# Altium PCB DX-PJ08-V1.1_PCB_Footprint_AD.PcbDoc
Units mm, origin at the board's own origin, x right, y up, seen from the top; angles counter-clockwise.
Board outline 152.4 x 101.6 mm, 2 copper layers (Top, Bottom), stack 0.323 mm thick; 1 components, 0 nets, 10 pads, 0 vias.
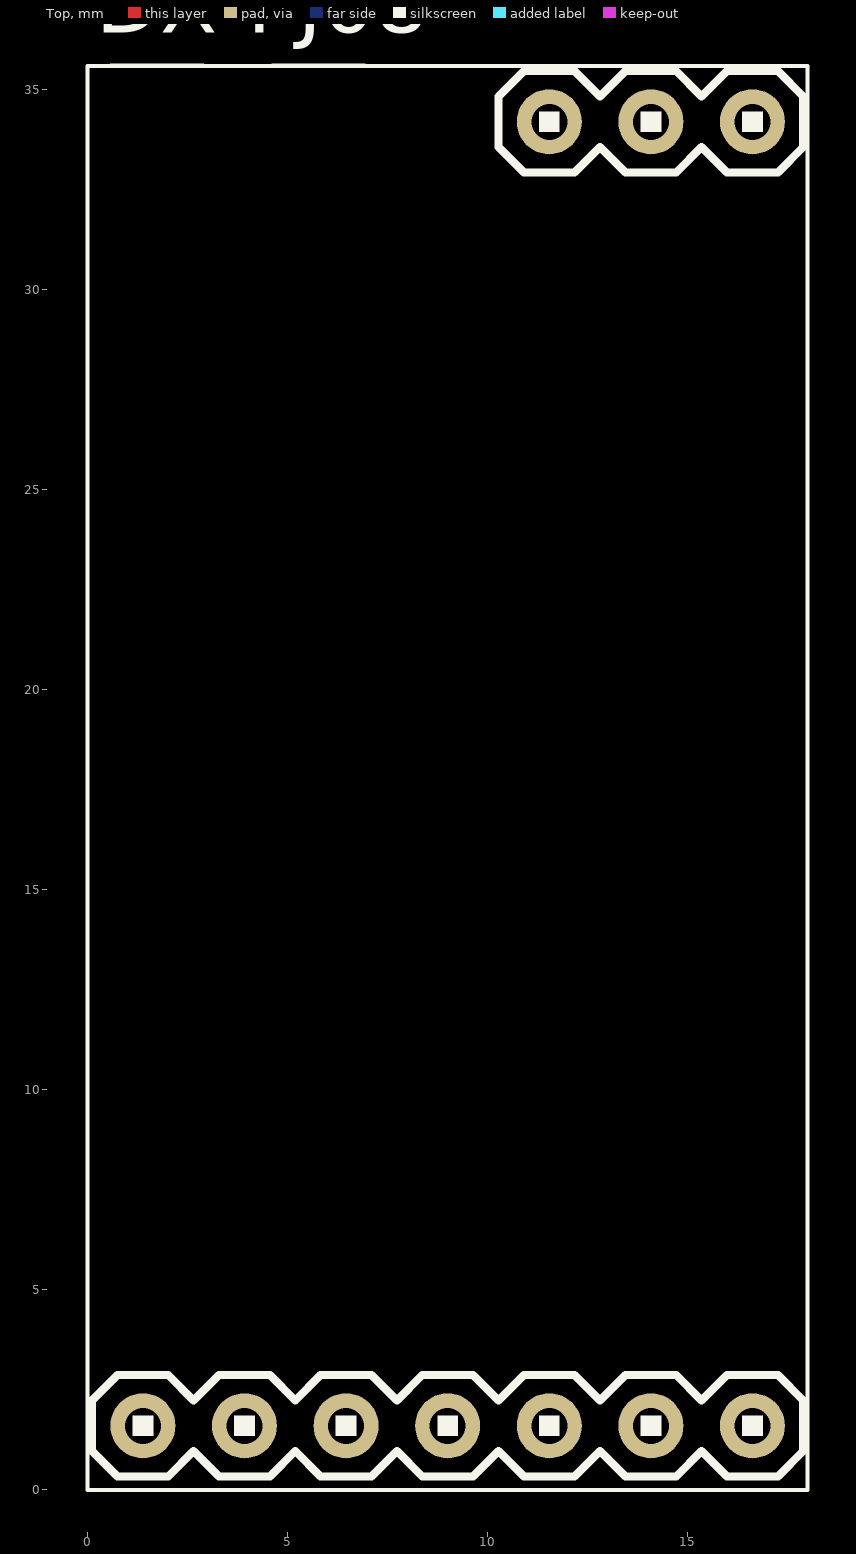
[diagram p0: Top view]
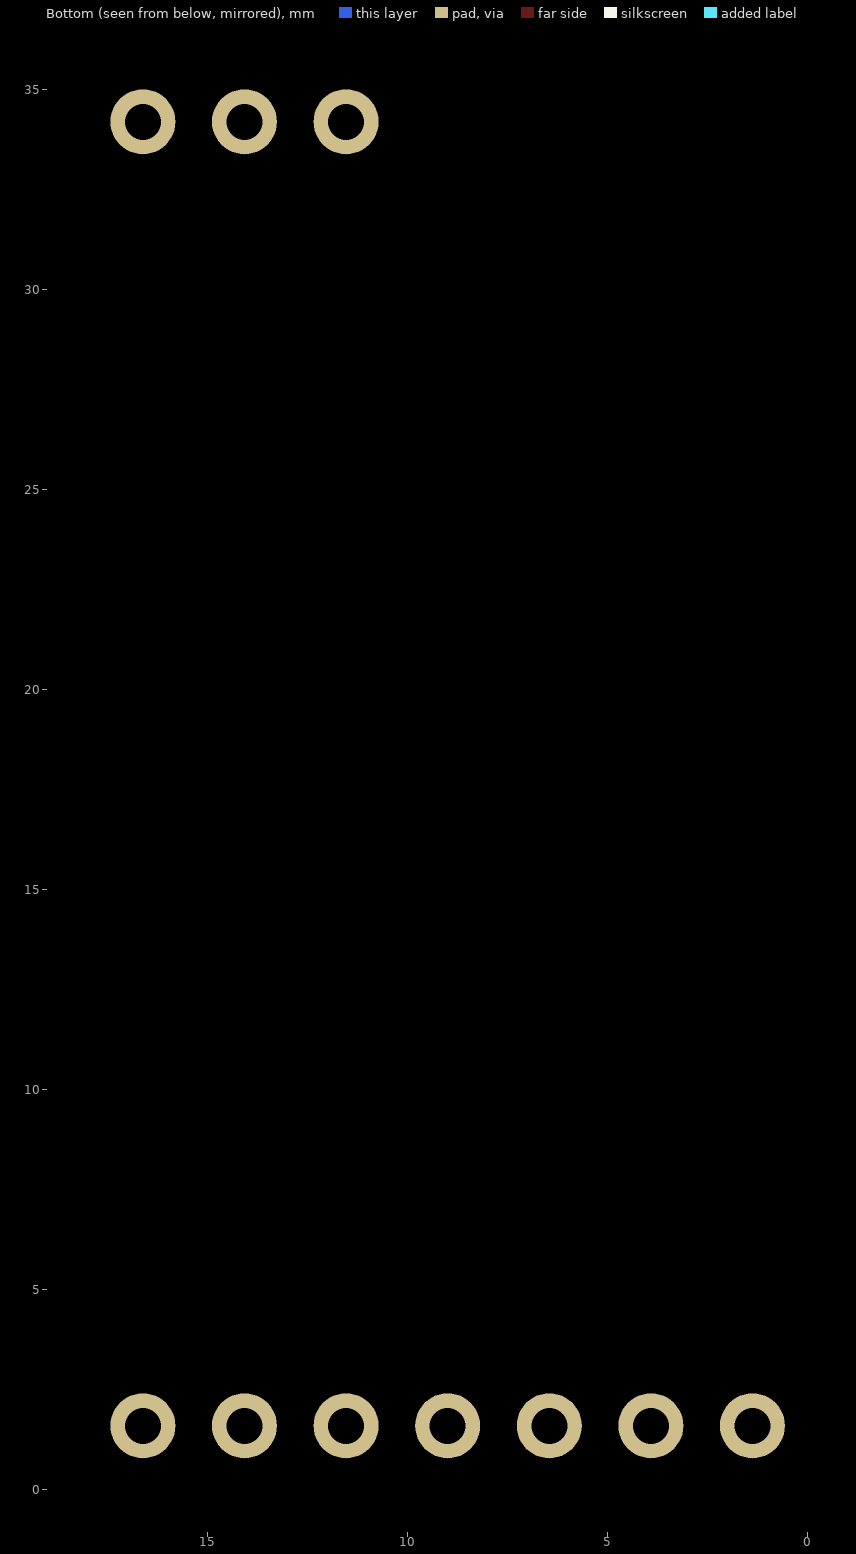
[diagram p1: Bottom view, seen from below]

## Layer stack, top to bottom
Solder Mask Top: solder mask 0.0102, Solder Resist, Dk 3.5
Top: signal copper 0.0343
Dielectric 1: dielectric 0.254, FR-4, Dk 4.3
Bottom: signal copper 0.0343
Solder Mask Bottom: solder mask 0.0102, Solder Resist, Dk 3.5

## Board outline
-694.363,-676.631 -541.963,-676.631 -541.963,-575.031 -694.363,-575.031

## Design rules (kind name [scope] priority, off if disabled: settings)
Clearance "'Default' PADS rule_17" [All] p1: gap=0.152 ignorepadtopadclearanceinfootprint=FALSE except(0: Arc-Hole Track-Hole SMDPad-Hole THPad-Hole Via-Hole Fill-Hole Poly-Hole Region-Hole Text-Hole)
Clearance "'Default' PADS rule_16" [InPolygon vs InPolygon] p2: gap=0.2 ignorepadtopadclearanceinfootprint=FALSE except(0: Arc-Hole Track-Hole SMDPad-Hole THPad-Hole Via-Hole Fill-Hole Poly-Hole Region-Hole Text-Hole)
Clearance "'Default' PADS rule_15" [All] p3: gap=0.152 ignorepadtopadclearanceinfootprint=FALSE except(0: Arc-Hole Track-Hole SMDPad-Hole THPad-Hole Via-Hole Fill-Hole Poly-Hole Region-Hole Text-Hole)
ComponentClearance "'Default' PADS rule_12" [All] p1: gap=0 collisioncheckmode=3 verticalgap=0.254 showdistances=FALSE
FlightTimeFalling "'Default' PADS rule_10" [All] p1: maximum=10.00
FlightTimeRising "'Default' PADS rule_9" [All] p1: maximum=10.00
Length "'Default' PADS rule_5" [All] p1: maxlimit=1270 minlimit=0
MatchedLengths "'Default' PADS rule_11" [InNetClass('All Nets')] p1: tolerance=5.08 checknetsindiffpair=TRUE checkdiffpairvsdiffpair=FALSE checkxsignals=FALSE checkothers=FALSE
MaxMinImpedance "'Default' PADS rule_8" [All] p1: minimum=50.00 maximum=150.0
ParallelSegment "'Default' PADS rule_7" [All] p1: limit=25.4 gap=5.08
ParallelSegment "'Default' PADS rule_6" [All] p2: limit=25.4 gap=5.08
PlaneClearance "'Default' PADS rule_14" [All] p1: clearance=0.2
PlaneConnect "Power Plane Connect Style - Via from round thru-hole global defaults" [IsVia] p1: planeconnectstyle=Direct reliefexpansion=0.508 reliefentries=4 reliefconductorwidth=0.381 reliefairgap=0.254
PlaneConnect "Power Plane Connect Style - Round thru-hole pad from global defaults" [IsPad And OnMultiLayer And (PadShape_MidLayer1 = 'Round') And (PadXSize_MidLayer1 = PadYSize_MidLayer1)] p2: planeconnectstyle=Direct reliefexpansion=0.508 reliefentries=4 reliefconductorwidth=0.381 reliefairgap=0.254
PlaneConnect "Power Plane Connect Style - Square thru-hole pad from global defaults" [IsPad And OnMultiLayer And ((PadShape_MidLayer1 = 'Rectangular') Or (PadShape_MidLayer1 = 'Octagonal') Or (PadShape_MidLayer1 = 'Rounded Rectangle')) And (PadXSize_MidLayer1 = PadYSize_MidLayer1)] p3: planeconnectstyle=Direct reliefexpansion=0.508 reliefentries=4 reliefconductorwidth=0.381 reliefairgap=0.254
PlaneConnect "Power Plane Connect Style - Rect thru-hole pad from global defaults" [IsPad And OnMultiLayer And ((PadShape_MidLayer1 = 'Rectangular') Or (PadShape_MidLayer1 = 'Octagonal') Or (PadShape_MidLayer1 = 'Rounded Rectangle')) And (PadXSize_MidLayer1 <> PadYSize_MidLayer1)] p4: planeconnectstyle=Direct reliefexpansion=0.508 reliefentries=4 reliefconductorwidth=0.381 reliefairgap=0.254
PlaneConnect "Power Plane Connect Style - Square-rect thru-hole pad from global defaults" [IsPad And OnMultiLayer And (PadShape_MidLayer1 = 'Rounded Rectangle') And (PadXSize_MidLayer1 = PadYSize_MidLayer1) And (Pad_CornerRadius_MidLayer1 = '0%')] p5: planeconnectstyle=Direct reliefexpansion=0.508 reliefentries=4 reliefconductorwidth=0.381 reliefairgap=0.254
PlaneConnect "Power Plane Connect Style - Oval thru-hole pad from global defaults" [IsPad And OnMultiLayer And (PadShape_MidLayer1 = 'Round') And (PadXSize_MidLayer1 <> PadYSize_MidLayer1)] p6: planeconnectstyle=Direct reliefexpansion=0.508 reliefentries=4 reliefconductorwidth=0.381 reliefairgap=0.254
PlaneConnect "Power Plane Connect Style - Round-oval thru-hole pad from global defaults" [IsPad And OnMultiLayer And (PadShape_MidLayer1 = 'Rounded Rectangle') And (PadXSize_MidLayer1 = PadYSize_MidLayer1) And (Pad_CornerRadius_MidLayer1 = '100%')] p7: planeconnectstyle=Direct reliefexpansion=0.508 reliefentries=4 reliefconductorwidth=0.381 reliefairgap=0.254
PolygonConnect "Polygon Connect Style - Bottom Round SMD from global defaults" [IsSMTPin And (PadShape_BottomLayer = 'Round') And (PadXSize_BottomLayer = PADYSize_BottomLayer) vs Layer = 'Bottom'] p1: connectstyle=Direct reliefconductorwidth=0.254 reliefentries=4 polygonreliefangle="45 Angle" airgapwidth=0.254
PolygonConnect "Polygon Connect Style - Top Round SMD from global defaults" [IsSMTPin And (PadShape_TopLayer = 'Round') And (PadXSize_TopLayer = PADYSize_TopLayer) vs Layer = 'Top'] p2: connectstyle=Direct reliefconductorwidth=0.254 reliefentries=4 polygonreliefangle="45 Angle" airgapwidth=0.254
PolygonConnect "Polygon Connect Style - Bottom Square SMD from global defaults 1" [IsSMTPin And (PadShape_BottomLayer = 'Rectangular') And (PadXSize_BottomLayer = PADYSize_BottomLayer) vs Layer = 'Bottom'] p3: connectstyle=Direct reliefconductorwidth=0.254 reliefentries=4 polygonreliefangle="45 Angle" airgapwidth=0.254
PolygonConnect "Polygon Connect Style - Bottom Square SMD from global defaults 2" [IsSMTPin And (PadShape_BottomLayer = 'Octagonal') And (PadXSize_BottomLayer = PADYSize_BottomLayer) vs Layer = 'Bottom'] p4: connectstyle=Direct reliefconductorwidth=0.254 reliefentries=4 polygonreliefangle="45 Angle" airgapwidth=0.254
PolygonConnect "Polygon Connect Style - Bottom Square SMD from global defaults 3" [IsSMTPin And (PadShape_BottomLayer = 'Rounded Rectangle') And (PadXSize_BottomLayer = PADYSize_BottomLayer) vs Layer = 'Bottom'] p5: connectstyle=Direct reliefconductorwidth=0.254 reliefentries=4 polygonreliefangle="45 Angle" airgapwidth=0.254
PolygonConnect "Polygon Connect Style - Top Square SMD from global defaults 1" [IsSMTPin And (PadShape_TopLayer = 'Rectangular') And (PadXSize_TopLayer = PADYSize_TopLayer) vs Layer = 'Top'] p6: connectstyle=Direct reliefconductorwidth=0.254 reliefentries=4 polygonreliefangle="45 Angle" airgapwidth=0.254
PolygonConnect "Polygon Connect Style - Top Square SMD from global defaults 2" [IsSMTPin And (PadShape_TopLayer = 'Octagonal') And (PadXSize_TopLayer = PADYSize_TopLayer) vs Layer = 'Top'] p7: connectstyle=Direct reliefconductorwidth=0.254 reliefentries=4 polygonreliefangle="45 Angle" airgapwidth=0.254
PolygonConnect "Polygon Connect Style - Top Square SMD from global defaults 3" [IsSMTPin And (PadShape_TopLayer = 'Rounded Rectangle') And (PadXSize_TopLayer = PADYSize_TopLayer) vs Layer = 'Top'] p8: connectstyle=Direct reliefconductorwidth=0.254 reliefentries=4 polygonreliefangle="45 Angle" airgapwidth=0.254
PolygonConnect "Polygon Connect Style - Bottom Rect SMD from global defaults 1" [IsSMTPin And (PadShape_BottomLayer = 'Rectangular') And (PadXSize_BottomLayer <> PADYSize_BottomLayer) vs Layer = 'Bottom'] p9: connectstyle=Direct reliefconductorwidth=0.254 reliefentries=4 polygonreliefangle="45 Angle" airgapwidth=0.254
PolygonConnect "Polygon Connect Style - Bottom Rect SMD from global defaults 2" [IsSMTPin And (PadShape_BottomLayer = 'Octagonal') And (PadXSize_BottomLayer <> PADYSize_BottomLayer) vs Layer = 'Bottom'] p10: connectstyle=Direct reliefconductorwidth=0.254 reliefentries=4 polygonreliefangle="45 Angle" airgapwidth=0.254
PolygonConnect "Polygon Connect Style - Bottom Rect SMD from global defaults 3" [IsSMTPin And (PadShape_BottomLayer = 'Rounded Rectangle') And (PadXSize_BottomLayer <> PADYSize_BottomLayer) vs Layer = 'Bottom'] p11: connectstyle=Direct reliefconductorwidth=0.254 reliefentries=4 polygonreliefangle="45 Angle" airgapwidth=0.254
PolygonConnect "Polygon Connect Style - Bottom Square-rect SMD pad from global defaults" [IsSMTPin And (PadShape_BottomLayer = 'Rounded Rectangle') And (PadXSize_BottomLayer = PADYSize_BottomLayer) And (Pad_CornerRadius_BottomLayer = '0%') vs Layer = 'Bottom'] p12: connectstyle=Direct reliefconductorwidth=0.254 reliefentries=4 polygonreliefangle="45 Angle" airgapwidth=0.254
PolygonConnect "Polygon Connect Style - Top Rect SMD from global defaults 1" [IsSMTPin And (PadShape_TopLayer = 'Rectangular') And (PadXSize_TopLayer <> PADYSize_TopLayer) vs Layer = 'Top'] p13: connectstyle=Direct reliefconductorwidth=0.254 reliefentries=4 polygonreliefangle="45 Angle" airgapwidth=0.254
PolygonConnect "Polygon Connect Style - Top Rect SMD from global defaults 2" [IsSMTPin And (PadShape_TopLayer = 'Octagonal') And (PadXSize_TopLayer <> PADYSize_TopLayer) vs Layer = 'Top'] p14: connectstyle=Direct reliefconductorwidth=0.254 reliefentries=4 polygonreliefangle="45 Angle" airgapwidth=0.254
PolygonConnect "Polygon Connect Style - Top Rect SMD from global defaults 3" [IsSMTPin And (PadShape_TopLayer = 'Rounded Rectangle') And (PadXSize_TopLayer <> PADYSize_TopLayer) vs Layer = 'Top'] p15: connectstyle=Direct reliefconductorwidth=0.254 reliefentries=4 polygonreliefangle="45 Angle" airgapwidth=0.254
PolygonConnect "Polygon Connect Style - Top Square-rect SMD pad from global defaults" [IsSMTPin And (PadShape_TopLayer = 'Rounded Rectangle') And (PadXSize_TopLayer = PADYSize_TopLayer) And (Pad_CornerRadius_TopLayer = '0%') vs Layer = 'Top'] p16: connectstyle=Direct reliefconductorwidth=0.254 reliefentries=4 polygonreliefangle="45 Angle" airgapwidth=0.254
PolygonConnect "Polygon Connect Style - Bottom Oval SMD from global defaults" [IsSMTPin And (PadShape_BottomLayer = 'Round') And (PadXSize_BottomLayer <> PADYSize_BottomLayer) vs Layer = 'Bottom'] p17: connectstyle=Direct reliefconductorwidth=0.254 reliefentries=4 polygonreliefangle="45 Angle" airgapwidth=0.254
PolygonConnect "Polygon Connect Style - Bottom Round-oval SMD pad from global defaults" [IsSMTPin And (PadShape_BottomLayer = 'Rounded Rectangle') And (PadXSize_BottomLayer = PADYSize_BottomLayer) And (Pad_CornerRadius_BottomLayer = '100%') vs Layer = 'Bottom'] p18: connectstyle=Direct reliefconductorwidth=0.254 reliefentries=4 polygonreliefangle="45 Angle" airgapwidth=0.254
PolygonConnect "Polygon Connect Style - Top Oval SMD from global defaults" [IsSMTPin And (PadShape_TopLayer = 'Round') And (PadXSize_TopLayer <> PADYSize_TopLayer) vs Layer = 'Top'] p19: connectstyle=Direct reliefconductorwidth=0.254 reliefentries=4 polygonreliefangle="45 Angle" airgapwidth=0.254
PolygonConnect "Polygon Connect Style - Top Round-oval SMD pad from global defaults" [IsSMTPin And (PadShape_TopLayer = 'Rounded Rectangle') And (PadXSize_TopLayer = PADYSize_TopLayer) And (Pad_CornerRadius_TopLayer = '100%') vs Layer = 'Top'] p20: connectstyle=Direct reliefconductorwidth=0.254 reliefentries=4 polygonreliefangle="45 Angle" airgapwidth=0.254
PolygonConnect "Polygon Connect Style - Via from round thru-hole global defaults_18" [IsVia] p21: connectstyle=Direct reliefconductorwidth=0.381 reliefentries=4 polygonreliefangle="45 Angle" airgapwidth=0.254
PolygonConnect "Polygon Connect Style - Bottom Round thru-hole pad from global defaults" [IsPad And OnMultiLayer And (PadShape_BottomLayer = 'Round') And (PadXSize_BottomLayer = PADYSize_BottomLayer) vs Layer = 'Bottom'] p22: connectstyle=Direct reliefconductorwidth=0.381 reliefentries=4 polygonreliefangle="45 Angle" airgapwidth=0.254
PolygonConnect "Polygon Connect Style - Via from round thru-hole global defaults" [IsVia] p23: connectstyle=Direct reliefconductorwidth=0.381 reliefentries=4 polygonreliefangle="45 Angle" airgapwidth=0.254
PolygonConnect "Polygon Connect Style - Top Round thru-hole pad from global defaults" [IsPad And OnMultiLayer And (PadShape_TopLayer = 'Round') And (PadXSize_TopLayer = PADYSize_TopLayer) vs Layer = 'Top'] p24: connectstyle=Direct reliefconductorwidth=0.381 reliefentries=4 polygonreliefangle="45 Angle" airgapwidth=0.254
PolygonConnect "Polygon Connect Style - Bottom Square thru-hole pad from global defaults" [IsPad And OnMultiLayer And ((PadShape_BottomLayer = 'Rectangular') Or (PadShape_BottomLayer = 'Octagonal') Or (PadShape_BottomLayer = 'Rounded Rectangle')) And (PadXSize_BottomLayer = PADYSize_BottomLayer) vs Layer = 'Bottom'] p25: connectstyle=Direct reliefconductorwidth=0.381 reliefentries=4 polygonreliefangle="45 Angle" airgapwidth=0.254
PolygonConnect "Polygon Connect Style - Top Square thru-hole pad from global defaults" [IsPad And OnMultiLayer And ((PadShape_TopLayer = 'Rectangular') Or (PadShape_TopLayer = 'Octagonal') Or (PadShape_TopLayer = 'Rounded Rectangle')) And (PadXSize_TopLayer = PADYSize_TopLayer) vs Layer = 'Top'] p26: connectstyle=Direct reliefconductorwidth=0.381 reliefentries=4 polygonreliefangle="45 Angle" airgapwidth=0.254
PolygonConnect "Polygon Connect Style - Bottom Rect thru-hole pad from global defaults" [IsPad And OnMultiLayer And ((PadShape_BottomLayer = 'Rectangular') Or (PadShape_BottomLayer = 'Octagonal') Or (PadShape_BottomLayer = 'Rounded Rectangle')) And (PadXSize_BottomLayer <> PADYSize_BottomLayer) vs Layer = 'Bottom'] p27: connectstyle=Direct reliefconductorwidth=0.381 reliefentries=4 polygonreliefangle="45 Angle" airgapwidth=0.254
PolygonConnect "Polygon Connect Style - Bottom Square-rect thru-hole pad from global defaults" [IsPad And OnMultiLayer And (PadShape_BottomLayer = 'Rounded Rectangle') And (PadXSize_BottomLayer = PADYSize_BottomLayer) And (Pad_CornerRadius_BottomLayer = '0%') vs Layer = 'Bottom'] p28: connectstyle=Direct reliefconductorwidth=0.381 reliefentries=4 polygonreliefangle="45 Angle" airgapwidth=0.254
PolygonConnect "Polygon Connect Style - Top Rect thru-hole pad from global defaults" [IsPad And OnMultiLayer And ((PadShape_TopLayer = 'Rectangular') Or (PadShape_TopLayer = 'Octagonal') Or (PadShape_TopLayer = 'Rounded Rectangle')) And (PadXSize_TopLayer <> PADYSize_TopLayer) vs Layer = 'Top'] p29: connectstyle=Direct reliefconductorwidth=0.381 reliefentries=4 polygonreliefangle="45 Angle" airgapwidth=0.254
PolygonConnect "Polygon Connect Style - Top Square-rect thru-hole pad from global defaults" [IsPad And OnMultiLayer And (PadShape_TopLayer = 'Rounded Rectangle') And (PadXSize_TopLayer = PADYSize_TopLayer) And (Pad_CornerRadius_TopLayer = '0%') vs Layer = 'Top'] p30: connectstyle=Direct reliefconductorwidth=0.381 reliefentries=4 polygonreliefangle="45 Angle" airgapwidth=0.254
PolygonConnect "Polygon Connect Style - Bottom Oval thru-hole pad from global defaults" [IsPad And OnMultiLayer And (PadShape_BottomLayer = 'Round') And (PadXSize_BottomLayer <> PADYSize_BottomLayer) vs Layer = 'Bottom'] p31: connectstyle=Direct reliefconductorwidth=0.381 reliefentries=4 polygonreliefangle="45 Angle" airgapwidth=0.254
PolygonConnect "Polygon Connect Style - Bottom Round-oval thru-hole pad from global defaults" [IsPad And OnMultiLayer And (PadShape_BottomLayer = 'Rounded Rectangle') And (PadXSize_BottomLayer = PADYSize_BottomLayer) And (Pad_CornerRadius_BottomLayer = '100%') vs Layer = 'Bottom'] p32: connectstyle=Direct reliefconductorwidth=0.381 reliefentries=4 polygonreliefangle="45 Angle" airgapwidth=0.254
PolygonConnect "Polygon Connect Style - Top Oval thru-hole pad from global defaults" [IsPad And OnMultiLayer And (PadShape_TopLayer = 'Round') And (PadXSize_TopLayer <> PADYSize_TopLayer) vs Layer = 'Top'] p33: connectstyle=Direct reliefconductorwidth=0.381 reliefentries=4 polygonreliefangle="45 Angle" airgapwidth=0.254
PolygonConnect "Polygon Connect Style - Top Round-oval thru-hole pad from global defaults" [IsPad And OnMultiLayer And (PadShape_TopLayer = 'Rounded Rectangle') And (PadXSize_TopLayer = PADYSize_TopLayer) And (Pad_CornerRadius_TopLayer = '100%') vs Layer = 'Top'] p34: connectstyle=Direct reliefconductorwidth=0.381 reliefentries=4 polygonreliefangle="45 Angle" airgapwidth=0.254
PolygonConnect [All] p35: connectstyle=Relief reliefconductorwidth=0.254 reliefentries=4 polygonreliefangle="90 Angle" airgapwidth=0.254
RoutingLayers "'Default' PADS rule_3" [All] p1: top layer_v5=TRUE bottom layer_v5=TRUE
RoutingPriority "'Default' PADS rule_2" [All] p1: routingpriority=3
RoutingTopology "'Default' PADS rule" [All] p1: topology=Shortest
RoutingVias "'Default' PADS rule_4" [All] p1: holewidth=0.23 width=0.5 viastyle="Through Hole" minholewidth=0.23 minwidth=0.5 maxholewidth=0.23 maxwidth=0.5
SolderMaskExpansion [All] p1: expansion=0.102 istentingtop=FALSE
Width "'Default' PADS rule_13" [All] p1: maxlimit=0.152 minlimit=0.152 preferedwidth=0.152
24 further rules are at their usual default settings.

## Components (designator, comment, footprint, x,y, rotation, side; value= is the part's Value field where it differs from the comment)
DX-PJ08 "Comment" PCBComponent_1 0,0 r0 top

## Footprints (in the part's own frame and the unit in brackets; to place one, negate y for a bottom-side part, rotate by r counter-clockwise, add the part's x,y. Pads: shape width x height; smd on the part's side, far side on the other; paste and mask are expansions set on the pad)
PCBComponent_1 [mm]
  round 1.626 hole 0.9: 1(1.38,1.6) 2(3.92,1.6) 3(6.46,1.6) 4(9,1.6) 5(11.54,1.6) 6(14.08,1.6) 7(16.62,1.6) 8(16.62,34.2) 9(14.08,34.2) 10(11.54,34.2)
  silkscreen extent 0,0 18,35.6

## Nets (pads, with @x,y where several pads share a name; then routed paths per layer and width w, separated by ;. In a path a pad name is that pad's centre, name@x,y a point inside that pad or via, vN(x,y) a via of type N, cw(c..) or ccw(c..) an arc to the next point about the centre after c; other vN are vias at no path point)
pads on no net: DX-PJ08.1 DX-PJ08.2 DX-PJ08.3 DX-PJ08.4 DX-PJ08.5 DX-PJ08.6 DX-PJ08.7 DX-PJ08.8 DX-PJ08.9 DX-PJ08.10